# EAGLE board REMOTE_PCB (EAGLE 9.7.0)
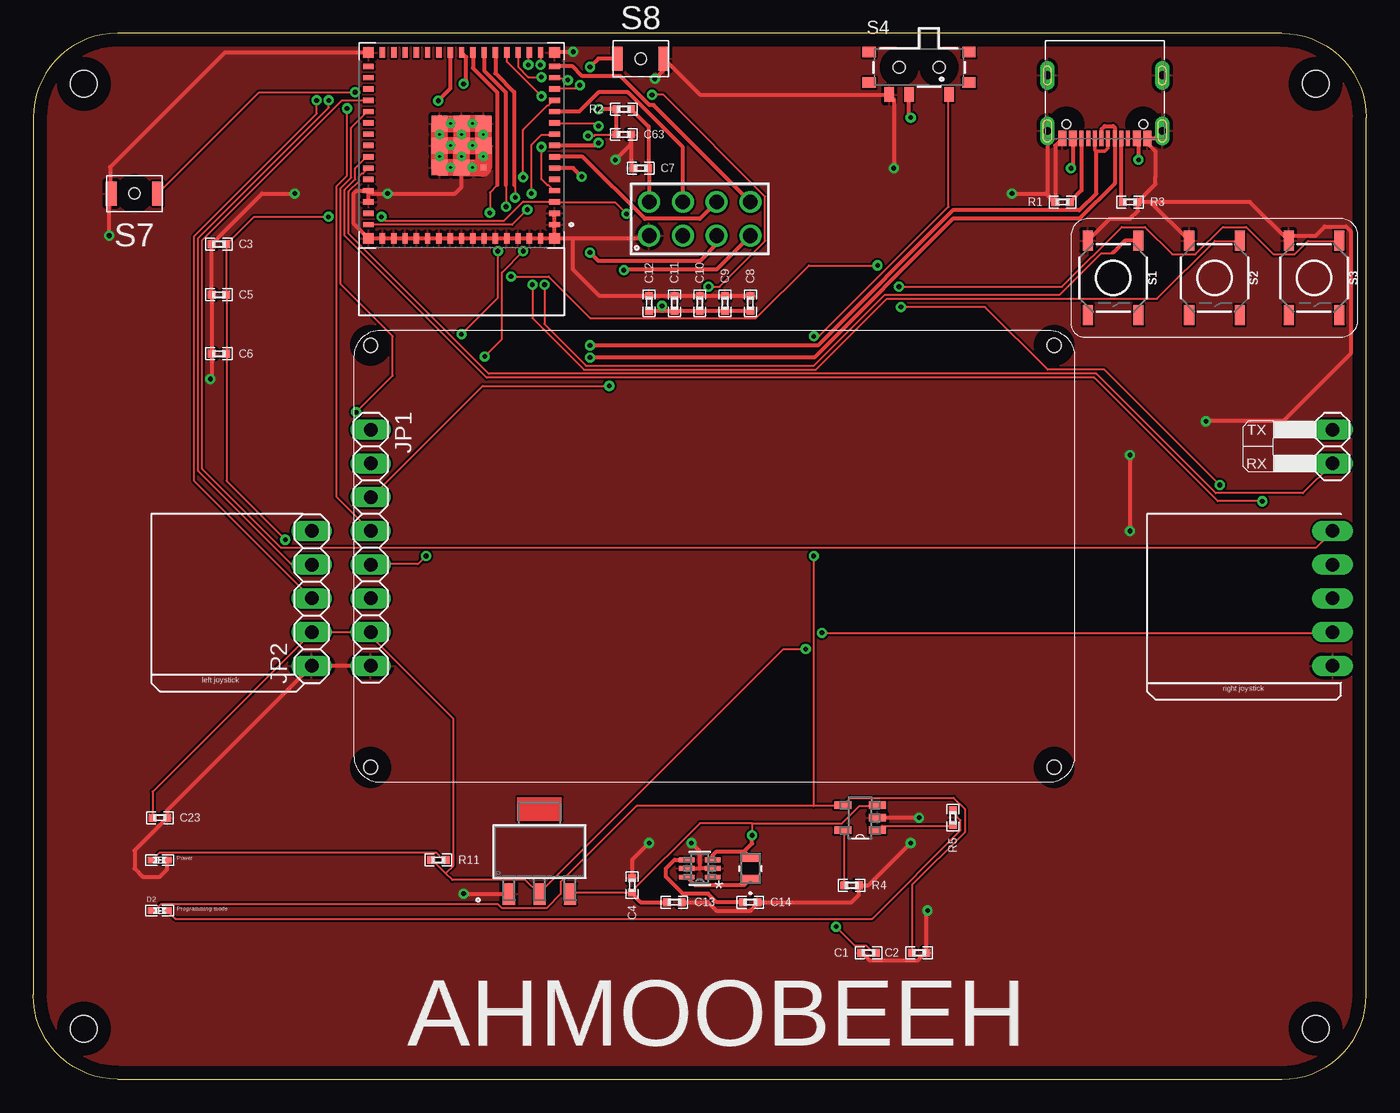
[diagram p0: board, top side]
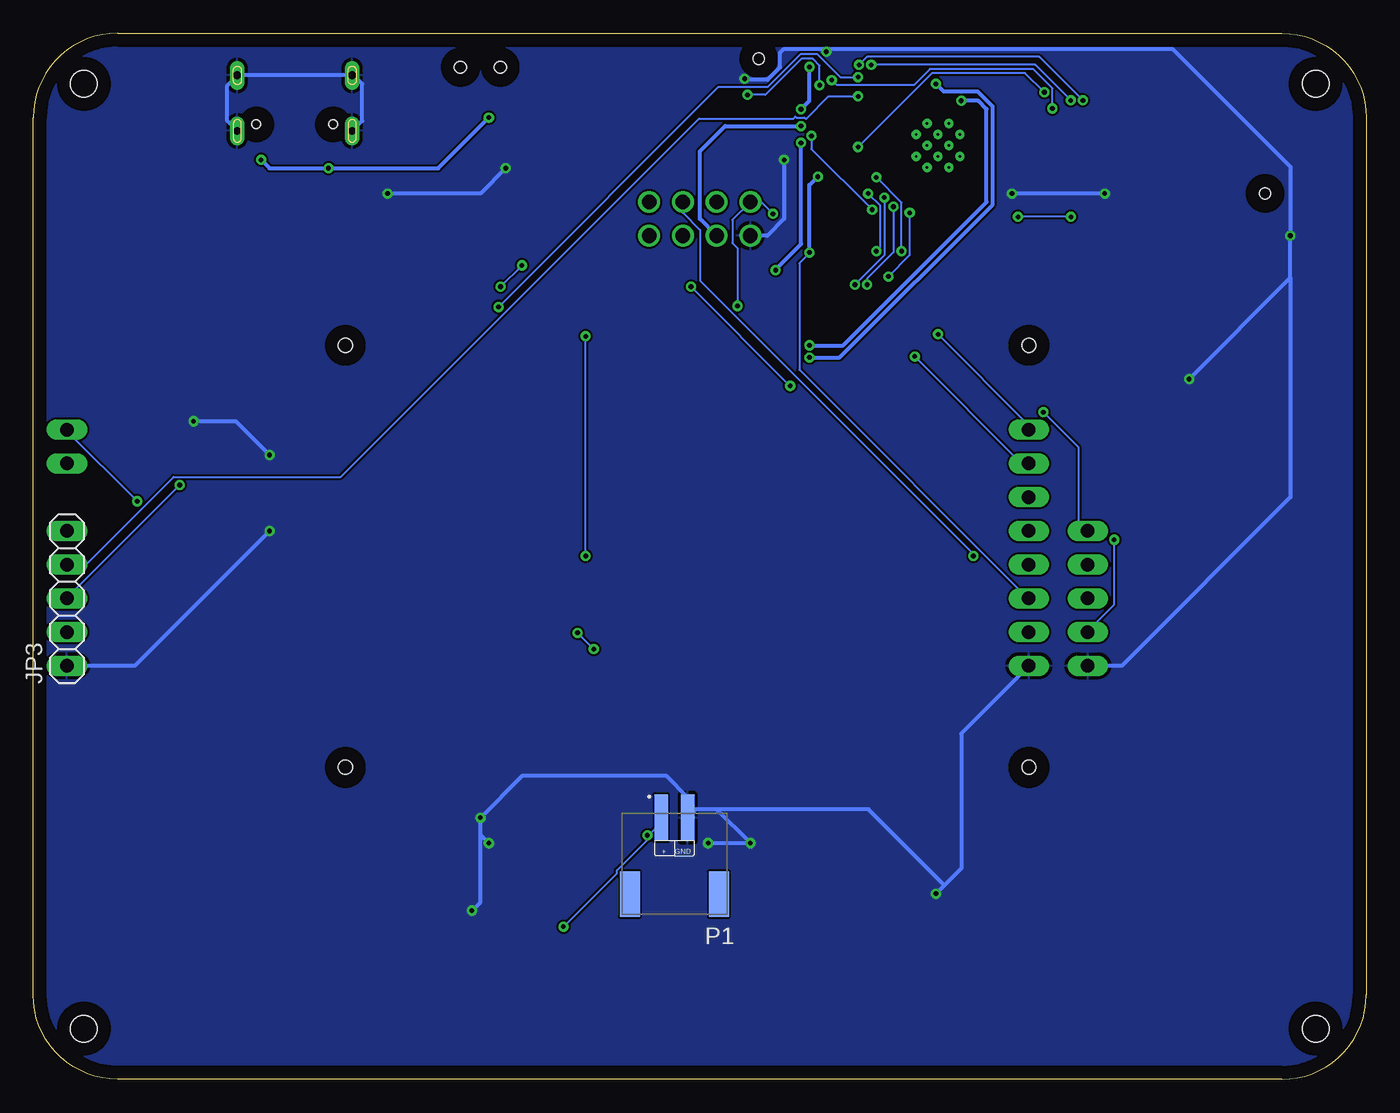
[diagram p1: board, bottom side, seen from below]

Size 100.33 x 78.74 mm. Coordinates in mm from the lower left corner, seen from the top.
Outline: 6.35,0 93.98,0 arc90 100.33,6.35 100.33,72.39 arc90 93.98,78.74 6.35,78.74 arc90 0,72.39 0,6.35 arc90 6.35,0
Copper layers (1*16): Top / Bottom
Stack-up Default Layer Stack: Top User Defined 0.035mm / Dielectric-1 User Defined 1.5mm / Bottom User Defined 0.035mm
Design rules: minimum copper width class=3 10mil, minimum copper width 6mil, minimum drill size 0.35mm, copper clearance wire_polygon to wire_polygon 6mil, copper clearance wire_polygon to pad_smd 6mil, copper clearance wire_polygon to via 6mil, copper clearance pad_smd to pad_smd 6mil, copper clearance pad_smd to via 6mil, copper clearance via to via 6mil, copper clearance smd to pad (same net) 6mil, copper clearance smd to via (same net) 6mil, copper clearance smd to smd (same net) 6mil, dimension clearance 40mil, via restrict clearance 0mil, restrict clearance 0mil, drill distance 6mil, keepout clearance 0mil
Net classes: 3 GND: width 0.254 mm
Holes 2 mm at 3.81,74.93 3.81,3.81 96.52,3.81 96.52,74.93
Holes 1.05 mm at 25.4,55.24 25.4,23.5 76.83,23.5 76.83,55.24

## Footprints (pad centres in the part's own frame; a part is rotated, then mirrored left to right if it is on the bottom)
0402 = smd 0.6 x 0.6: 1 -0.55,0; 2 0.55,0
SOT-223_STM = smd 0.914 x 1.6: 1 -2.3,-3.2; 2 0,-3.2; 3 2.3,-3.2
0402.LED = smd 0.7 x 0.5: P$1 -0.55,0; P$2 0.55,0
61300821121 = drill 1.1: 1 -3.81,-1.27; 2 -3.81,1.27; 3 -1.27,-1.27; 4 -1.27,1.27; 5 1.27,-1.27; 6 1.27,1.27; 7 3.81,-1.27; 8 3.81,1.27
1X08 = drill 1.016 long: 1 -8.89,0; 2 -6.35,0; 3 -3.81,0; 4 -1.27,0; 5 1.27,0; 6 3.81,0; 7 6.35,0; 8 8.89,0
1X05 = drill 1.016 long: 1 -5.08,0; 2 -2.54,0; 3 0,0; 4 2.54,0; 5 5.08,0
IND_TAIYO_LBR2012_TAY = smd 0.61 x 1.448: 1 -0.8,0; 2 0.8,0
JST_S2B-PH-SM4-TB = smd 1 x 3.5: 1 1,0; 2 -1,0 | smd 1.5 x 3.4: P1 3.35,5.75; P2 -3.35,5.75
TACTILE_SWITCH_SMD_5.2MM = smd 1.524 x 0.762: 1 -2.794,1.905; 2 2.794,1.905; 3 -2.794,-1.905; 4 2.794,-1.905
450404015514 = smd 0.7 x 1.1: 1 2.25,-2.05; 2 -0.75,-2.05; 3 -2.25,-2.05 | smd 1 x 0.8: Z1 -3.75,1.15; Z2 3.75,1.15; Z3 3.75,-1.15; Z4 -3.75,-1.15 | hole 0.9: -1.5,0; 1.5,0
B3U-1000P(M)-B = smd 0.8 x 1.8: 1 -1.75,0; 2 1.75,0 | hole 0.85: 0,0
SC70-SC6_LIT = smd 1.168 x 0.356: 1 -0.965,0.65; 2 -0.965,0; 3 -0.965,-0.65; 4 0.965,-0.65; 5 0.965,0; 6 0.965,0.65
SOT95P280X145-5N = smd 1.27 x 0.559: 1 -1.295,0.94; 2 -1.295,0; 3 -1.295,-0.94; 4 1.295,-0.94; 5 1.295,0.94
1X02 = drill 1.016 long: 1 -1.27,0; 2 1.27,0
XCVR_ESP32_S3_MINI-1-N4R2 = smd 0.8 x 0.4: 1 -7.09,6.24; 2 -7.09,5.39; 3 -7.09,4.54; 4 -7.09,3.69; 5 -7.09,2.84; 6 -7.09,1.99; 7 -7.09,1.14; 8 -7.09,0.29; 9 -7.09,-0.56; 10 -7.09,-1.41; 11 -7.09,-2.26; 12 -7.09,-3.11; 13 -7.09,-3.96; 14 -7.09,-4.81; 15 -7.09,-5.66; 31 6.91,-5.66; 32 6.91,-4.81; 33 6.91,-3.96; 34 6.91,-3.11; 35 6.91,-2.26; 36 6.91,-1.41; 37 6.91,-0.56; 38 6.91,0.29; 39 6.91,1.14; 40 6.91,1.99; 41 6.91,2.84; 42 6.91,3.69; 43 6.91,4.54; 44 6.91,5.39; 45 6.91,6.24 | smd 0.4 x 0.8: 16 -6.04,-6.71; 17 -5.19,-6.71; 18 -4.34,-6.71; 19 -3.49,-6.71; 20 -2.64,-6.71; 21 -1.79,-6.71; 22 -0.94,-6.71; 23 -0.09,-6.71; 24 0.76,-6.71; 25 1.61,-6.71; 26 2.46,-6.71; 27 3.31,-6.71; 28 4.16,-6.71; 29 5.01,-6.71; 30 5.86,-6.71; 46 5.86,7.29; 47 5.01,7.29; 48 4.16,7.29; 49 3.31,7.29; 50 2.46,7.29; 51 1.61,7.29; 52 0.76,7.29; 53 -0.09,7.29; 54 -0.94,7.29; 55 -1.79,7.29; 56 -2.64,7.29; 57 -3.49,7.29; 58 -4.34,7.29; 59 -5.19,7.29; 60 -6.04,7.29 | smd 0.4 x 0.4: 61_1 -1.74,1.94 | smd 1.2 x 1.2: 61_2 -0.09,1.94; 61_3 1.56,1.94; 61_4 -1.74,0.29; 61_5 -0.09,0.29; 61_6 1.56,0.29; 61_7 -1.74,-1.36; 61_8 -0.09,-1.36; 61_9 1.56,-1.36 | smd 0.8 x 0.8: 62 -7.09,7.29; 63 -7.09,-6.71; 64 6.91,-6.71; 65 6.91,7.29 | drill 0.2 pad 0.35: 66_1 -0.915,1.94; 66_2 0.735,1.94; 66_3 -1.74,1.115; 66_4 -0.09,1.115; 66_5 1.56,1.115; 66_6 -0.915,0.29; 66_7 0.735,0.29; 66_8 -1.74,-0.535; 66_9 -0.09,-0.535; 66_10 1.56,-0.535; 66_11 -0.915,-1.36; 66_12 0.735,-1.36
12402012E212A = smd 0.6 x 1.14: A1_B12 -3.2,4.75; A4_B9 -2.4,4.75; B1_A12 3.2,4.75; B4_A9 2.4,4.75 | smd 0.3 x 1.14: A5 -1.25,4.75; A6 -0.25,4.75; A7 0.25,4.75; A8 1.25,4.75; B5 1.75,4.75; B6 0.75,4.75; B7 -0.75,4.75; B8 -1.75,4.75 | drill 0.6 pad 1.05 long: SH1 -4.32,4.18; SH2 4.32,4.18 | drill 0.6 pad 0.9 long: SH3 -4.32,0; SH4 4.32,0 | hole 0.65: 2.89,3.68; -2.89,3.68

## Placement (x,y rotation side)
C1  0.1uF  [0402]  62.87,9.53 180 top
C2  0.1uF  [0402]  66.67,9.53 180 top
C3  0.1uF  [0402]  13.97,62.87 0 top
C4  0.1uF  [0402]  45.09,14.61 270 top
C5  100uF  [0402]  13.97,59.05 0 top
C6  100uF  [0402]  13.97,54.61 0 top
C7  100uF  [0402]  45.72,68.58 0 top
C8  100uF  [0402]  53.98,58.42 90 top
C9  100uF  [0402]  52.07,58.42 90 top
C10  100uF  [0402]  50.16,58.42 90 top
C11  100uF  [0402]  48.26,58.42 90 top
C12  100uF  [0402]  46.35,58.42 90 top
C13  1uF  [0402]  48.26,13.34 0 top
C14  10uF  [0402]  53.98,13.34 0 top
C23  0.1uF  [0402]  9.53,19.68 0 top
C63  0.1uF  [0402]  44.45,71.12 0 top
CR1  LD1117S33CTRSOT-223_STM  [SOT-223_STM]  38.1,17.14 0 top
D1  GREEN  [0402.LED]  9.53,16.51 0 top
D2  GREEN  [0402.LED]  9.53,12.7 0 top
J1  6130XX21121_61300821121  [61300821121]  50.16,64.77 0 top
JP1  PINHD-1X8  [1X08]  25.4,40.01 270 top
JP2  PINHD-1X5  [1X05]  20.95,36.2 90 top
JP3  PINHD-1X5  [1X05]  97.79,36.2 90 bottom
L1  LBR2012T100KIND_TAIYO_LBR2012_TAY  [IND_TAIYO_LBR2012_TAY]  53.98,15.88 90 top
P1  S2B-PH-SM4-TB  [JST_S2B-PH-SM4-TB]  52.07,19.68 180 bottom
R1  5.1K  [0402]  77.47,66.04 180 top
R2  10K  [0402]  44.45,73.03 180 top
R3  5.1K  [0402]  82.55,66.04 0 top
R4  2K  [0402]  61.59,14.61 0 top
R5  470  [0402]  69.22,19.68 270 top
R11  330  [0402]  30.48,16.51 0 top
S1  MOMENTARY-SWITCH-SPST-SMD-5.2MM-TALL  [TACTILE_SWITCH_SMD_5.2MM]  81.28,60.33 270 top
S2  MOMENTARY-SWITCH-SPST-SMD-5.2MM-TALL  [TACTILE_SWITCH_SMD_5.2MM]  88.9,60.33 270 top
S3  MOMENTARY-SWITCH-SPST-SMD-5.2MM-TALL  [TACTILE_SWITCH_SMD_5.2MM]  96.39,60.33 270 top
S4  450404015514  [450404015514]  66.67,76.17 0 top
S7  B3U-1000P(M)-B  [B3U-1000P(M)-B]  7.62,66.67 180 top
S8  B3U-1000P(M)-B  [B3U-1000P(M)-B]  45.72,76.82 0 top
U1  LTC3525ESC6-3.3TRMPBFSC70-SC6_LIT  [SC70-SC6_LIT]  50.16,15.88 180 top
U$1  MCP73831T-2ACI/OT  [SOT95P280X145-5N]  62.23,19.68 180 top
U$2  PINHD-1X02_1X02M  [1X02]  97.79,47.62 270 top
U$4  ESP32_S3_MINI  [XCVR_ESP32_S3_MINI-1-N4R2]  32.15,70.58 180 top
U$8  USB-C-1612402012E212A  [12402012E212A]  80.64,75.56 180 top

## Library data of the parts
C1-C14 C23 C63 D1 D2 R1-R5 R11 = CL-StandardParts
CR1 = LD1117; COPYRIGHT: Copyright (C) 2024 Ultra Librarian. All rights reserved.; MANUFACTURER_PART_NUMBER: LD1117S33CTR; MFR_NAME: STMicroelectronics
J1 = 6130XX21121_61300821121
JP1 = Connector; CATEGORY: Headers; DESCRIPTION: Header, Straight, 8 Position; MANUFACTURER: Generic; MPN: Generic; OPERATING_TEMPERATURE: Generic; PART_STATUS: Active; PITCH: 0.100" (2.54mm); ROHS_COMPLIANCE: Generic; SERIES: Generic; SUB-CATEGORY: Headers, Male Pins; TYPE: Board to Board or Cable, Unshrouded, Through Hole, Straight
JP2 JP3 = Connector; CATEGORY: Headers; DESCRIPTION: Header, Straight, 5 Position; MANUFACTURER: Generic; MPN: Generic; OPERATING_TEMPERATURE: Generic; PART_STATUS: Active; PITCH: 0.100" (2.54mm); ROHS_COMPLIANCE: Generic; SERIES: Generic; SUB-CATEGORY: Headers, Male Pins; TYPE: Board to Board or Cable, Unshrouded, Through Hole, Straight
L1 = 2025-04-16_01-13-47_Library; COPYRIGHT: Copyright (C) 2025 Ultra Librarian. All rights reserved.; MANUFACTURER_PART_NUMBER: LBR2012T100K; MFR_NAME: Taiyo Yuden
P1 = S2B-PH-SM4-TB; MANUFACTURER: JST
S1-S3 = SparkFun-Switches; PROD_ID: SWCH-14139
S4 = 450404015514
S7 S8 = Switch; CATEGORY: SWITCH; DESCRIPTION: Ultra-small Surface-mounting Tactile Switches with High Contact Reliability; MANUFACTURER: OMRON; OPERATING_TEMPERATURE: -25°C to +70°C at 60%RH max; PART_STATUS: ACTIVE; SERIES: B3U; TYPE: Tactile
U1 = 2025-04-16_00-30-35_Library; COPYRIGHT: Copyright (C) 2025 Ultra Librarian. All rights reserved.; MANUFACTURER_PART_NUMBER: LTC3525ESC6-3.3#TRMPBF; MFR_NAME: Analog Devices Inc
U$1 = MCP73831T-2ACI_OT; MPN: MCP73831T-2ACI/OT; OC_FARNELL: 1332158; OC_NEWARK: 56K7045; PACKAGE: SOT-5; SUPPLIER: Microchip
U$2 = Tinkercad
U$4 = CL-Digital IC; DIGIKEY: 1965-ESP32-S3-MINI-1-N4R2CT-ND; LCSC: C3013941
U$8 = CL-Connectors; DIGIKEY: 664-12402012E212ACT-ND; LCSC: C393939

## Nets
3.3V [diff_pair]: C3.2 C5.2 C6.2 C7.2 C8.1 C9.1 C10.1 C11.1 C12.1 C23.1 CR1.2 J1.2 JP1.7 JP2.2 JP3.2 R2.1 R11.1 U$4.3
5V [diff_pair]: C14.1 U1.4
BLK: JP1.1 U$4.12
CE: J1.3 U$4.10
CNS: J1.4 U$4.11
CS_LCD: JP1.2 U$4.9
DC: JP1.3 U$4.13
EN: C63.1 R2.2 S8.1 U$4.45
GND [GND]: C1.2 C2.1 C3.1 C4.1 C5.1 C6.1 C7.1 C8.2 C9.2 C10.2 C11.2 C12.2 C13.2 C14.2 C23.2 C63.2 CR1.1 D1.P$2 J1.1 JP1.8 JP2.1 JP3.1 P1.2 R1.2 R3.2 R4.2 S1.3 S2.3 S3.3 S4.3 S7.2 S8.2 U1.2 U1.5 U$1.2 U$4.1 U$4.2 U$4.42 U$4.43 U$4.46 U$4.47 U$4.48 U$4.49 U$4.50 U$4.51 U$4.52 U$4.53 U$4.54 U$4.55 U$4.56 U$4.57 U$4.58 U$4.59 U$4.60 U$4.61_1 U$4.61_2 U$4.61_3 U$4.61_4 U$4.61_5 U$4.61_6 U$4.61_7 U$4.61_8 U$4.61_9 U$4.62 U$4.63 U$4.64 U$4.65 U$8.A1_B12 U$8.B1_A12 U$8.SH1 U$8.SH2 U$8.SH3 U$8.SH4
GPIO0: S7.1 U$4.4
IRQ: J1.8 U$4.15
LEFT_J_SW: JP2.5 U$4.35
LEFT_J_X: JP2.3 U$4.16
LEFT_J_Y: JP2.4 U$4.17
MISO: J1.7 U$4.8
MOSI: J1.6 JP1.5 U$4.7
N$1: R1.1 U$8.B5
N$2: R3.1 U$8.A5
N$3: D1.P$1 R11.2
N$5: D2.P$2 R5.1
N$6: R5.2 U$1.1
N$7: C2.2 D2.P$1 S4.1 U$1.4
N$8: R4.1 U$1.5
N$10: L1.1 U1.6
N$11: U$4.36
RIGHT_J_SW: JP3.5 U$4.34
RIGHT_J_X: JP3.3 U$4.18
RIGHT_J_Y: JP3.4 U$4.19
RST: JP1.4 U$4.14
RX: U$2.2 U$4.40
SCK: J1.5 JP1.6 U$4.6
SW1: S1.1 U$4.20
SW2: S2.1 U$4.21
SW3: S3.1 U$4.22
TX: U$2.1 U$4.39
USB_D_N: U$4.23 U$8.A7 U$8.B7
USB_D_P: U$4.24 U$8.A6 U$8.B6
VBAT: C1.1 C4.2 C13.1 CR1.3 L1.2 P1.1 U1.3 U$1.3
VUSB: S4.2 U$8.A4_B9 U$8.B4_A9

## Tracks (layer width: path | path; a pad name or v marks a point on that pad's centre or on a via)
3.3V  (via drill 0.35)
  Top 0.152: v44.65,65.15 43.81,65.99 39.24,65.99 U$4.3 39.17,66.06 36.88,66.06 35.43,64.62 26.52,64.62 v26.21,64.92 | v47.32,58.22 47.32,57.87 | 14.55,59.05 14.55,54.63 C6.2 14.55,54.56 14.55,45.03 v18.97,40.62 | 14.55,59.05 14.55,62.87 | 14.55,59.05 C5.2 | C23.1 8.99,19.74 8.99,21.64 20.95,33.6 JP2.2 20.95,33.68 25.38,33.68 JP1.7 25.45,33.6 25.45,33.3 31.62,27.13 31.62,16.08 31.05,15.51 | 14.55,62.87 16.61,64.92 v22.23,64.92 | 14.55,62.87 C3.2 | 31.05,15.51 31.55,15.01 37.03,15.01 CR1.2 38.1,14.02 56.46,32.38 v58.14,32.38 | 31.05,15.51 30.1,16.46 29.95,16.46 R11.1 | v59.36,33.6 97.77,33.6 JP3.2
  Top 0.305: C7.2 46.31,68.54 | 46.31,68.54 46.35,68.5 J1.2 | R2.1 46.31,71.71 46.31,68.54 | C12.1 47.32,57.87 C11.1 C10.1 C9.1 C8.1
  Bottom 0.152: v44.65,65.15 45.57,66.06 46.33,66.06 J1.2 47.7,64.69 47.7,62.94 47.32,62.56 v47.32,58.22 | v18.97,40.62 18.97,35.74 20.95,33.76 JP2.2 | v58.14,32.38 v59.36,33.6 | v22.23,64.92 v26.21,64.92
5V
  Top 0.305: C14.1 51.44,13.34 50.8,13.97 48.9,13.97 47.62,15.24 47.62,15.88 48.27,16.52 U1.4
BLK  (via drill 0.35)
  Top 0.152: v36.88,67.89 36.88,71.48 38.71,73.3 38.79,73.3 39.17,73.69 U$4.12 | v34.98,62.33 34.98,58.83 v32.23,56.08
  Bottom 0.152: v36.88,67.89 34.98,65.99 v34.98,62.33 | v32.23,56.08 25.45,49.3 25.45,48.92 JP1.1
CE  (via drill 0.35)
  Top 0.152: v42.55,71.75 42.37,71.93 39.24,71.93 U$4.10
  Bottom 0.305: J1.3 50.16,64.77 50.16,69.85 48.26,71.75 v42.55,71.75
CNS
  Top 0.305: U$4.11 41.09,72.84 42.55,74.3 44.76,74.3 48.9,70.16 J1.4
CS_LCD  (via drill 0.35)
  Top 0.152: v37.49,66.67 37.49,70.33 38.25,71.09 39.17,71.09 U$4.9 | v36.88,62.33 35.28,60.73 35.28,55.7 v33.98,54.41
  Bottom 0.152: v37.49,66.67 36.58,65.76 36.58,62.64 v36.88,62.33 | v33.98,54.41 25.98,46.41 25.45,46.41 JP1.2
DC  (via drill 0.35)
  Top 0.152: v41.15,74.83 40.92,74.6 39.24,74.6 U$4.13 | v50.83,59.66 51.66,59.66 55.09,63.09 55.09,66.45 47.44,74.1 v46.57,74.1 | v43.36,52.2 33.83,52.2 25.45,43.81 JP1.3
  Bottom 0.152: v43.36,52.2 v50.83,59.66 | v41.15,74.83 41.15,76.3 41.66,76.81 42.51,76.81 45.22,74.1 v46.57,74.1
EN  (via drill 0.35)
  Top 0.152: v37.19,65.46 36.04,64.31 25.3,64.31 U$4.45 | v41.76,71.02 42.22,71.02 42.29,71.09 43.81,71.09 C63.1
  Top 0.305: C63.1 R2.2 v42.55,73.03 | S8.1 42.53,76.82 v41.91,76.2
  Bottom 0.152: v37.19,65.46 41.76,70.03 v41.76,71.02
  Bottom 0.305: v41.91,76.2 41.91,73.66 v42.55,73.03
GND  (via drill 0.35)
  Top 0.305: C7.1 45,68.75 C63.2 45,70.4 v43.81,69.22 | J1.1 46.14,63.29 40.64,63.29 | 40.64,63.29 U$4.62 | U$4.62 U$4.1 U$4.2 | U$4.62 U$4.60 U$4.59 U$4.58 U$4.57 U$4.56 U$4.55 U$4.54 U$4.53 U$4.52 U$4.51 U$4.50 U$4.49 U$4.48 U$4.47 U$4.46 U$4.65 24.13,64.39 24.13,66.67 24.34,66.89 U$4.42 | C8.2 C9.2 C10.2 C11.2 C12.2 42.63,58.97 40.64,60.96 40.64,63.29 | U$8.B1_A12 76.92,70.29 R1.2 | U$8.SH1 84.39,70.81 U$8.A1_B12 83.84,70.46 84.45,69.85 84.45,67.94 84.45,67.39 R3.2 | R3.2 83.14,66.08 83.14,66.04 | S1.3 81.03,64.77 82.55,64.77 83.14,65.36 83.14,66.04 | S2.3 84.07,66.04 83.14,66.04 | R3.2 91.57,66.04 S3.3 94.87,63.5 96.52,63.5 97.21,64.19 98.81,64.19 99.16,63.83 99.16,54.61 94.08,49.53 v88.27,49.53 | S8.2 47.54,76.75 | 47.54,76.75 50.17,74.12 S4.3 64.77,73.78 v64.77,68.58 | R1.2 76.83,66.04 76.2,66.67 v73.66,66.67 | U$8.SH2 76.33,66.64 R1.2 | U$4.63 39.3,77.35 v40.64,77.35 | v46.78,75.31 47.54,76.07 47.54,76.75 | v13.34,52.7 13.42,52.79 C6.1 C5.1 C3.1 17.23,66.67 v19.68,66.67 | v5.71,63.5 5.71,66.52 5.79,66.6 | 5.79,66.6 S7.2 | JP1.8 JP2.1 10.07,20.23 C23.2 7.62,17.23 7.62,15.88 8.26,15.24 9.53,15.24 10.07,15.79 D1.P$2 | v32.38,13.97 35.77,13.97 CR1.1 | C4.1 45.09,16.51 v46.35,17.78 | C1.2 62.38,9.53 62.99,8.92 66.55,8.92 67.16,9.53 C2.1 67.22,12.62 v67.31,12.7 | v66.04,17.78 62.87,14.61 R4.2 62.15,13.88 61.59,13.34 C14.2 54.52,13.25 53.98,12.7 51.42,12.7 50.79,13.34 C13.2 | v66.67,19.68 U$1.2 | U$4.43 U$4.42 | U$4.42 25.45,66.67 v26.67,66.67 31.75,66.67 32.24,67.16 32.24,68.58 U$4.61_2 | v82.55,46.99 v82.55,41.27 | U$4.64 14.42,77.29 5.79,68.66 5.79,66.6 | U1.5 50.16,15.88 | U1.2 50.16,15.88
  Top 0.305: 50.16,15.88 50.16,17.14 v49.53,17.78
  Top 1.27: U$4.61_6 U$4.61_3 U$4.61_2 U$4.61_5 | U$4.61_6 U$4.61_9 U$4.61_8 | U$4.61_8 U$4.61_5 | U$4.61_5 U$4.61_4 | U$4.61_4 U$4.61_7 U$4.61_8 | U$4.61_4 U$4.61_1 33.83,68.58 32.24,68.58 | U$4.61_5 U$4.61_6
  Bottom 0.305: v43.81,69.22 43.81,64.77 45.09,63.5 J1.1 | U$8.SH2 75.56,72.14 75.56,74.93 76.2,75.56 U$8.SH4 U$8.SH3 85.72,74.81 85.72,72.14 U$8.SH1 85.33,71.75 | v64.77,68.58 66.67,66.67 v73.66,66.67 | 40.87,77.57 v40.64,77.35 | 40.87,77.57 43.81,77.57 44.13,77.26 44.13,76.16 45.06,75.23 46.69,75.23 | 46.69,75.23 | 46.69,75.23 v46.78,75.31 | v13.34,52.7 5.71,60.33 | 5.71,60.33 v5.71,63.5 5.71,68.68 14.61,77.57 40.87,77.57 | JP1.8 30.48,26.04 30.48,15.88 31.75,14.61 | 31.75,14.61 v32.38,13.97 | 31.75,14.61 37.47,20.32 48.9,20.32 | 48.9,20.32 v46.35,17.78 v49.53,17.78 | 48.9,20.32 50.44,20.32 P1.2 51.07,21.23 52.7,22.86 63.5,22.86 v66.67,19.68 66.67,18.41 | v66.04,17.78 66.67,18.41 | v67.31,12.7 66.67,13.34 66.67,18.41 | v88.27,49.53 85.09,49.53 v82.55,46.99 | v82.55,41.27 92.71,31.11 JP3.1 | v19.68,66.67 v26.67,66.67 | 5.71,60.33 5.71,43.81 18.41,31.11 JP2.1
  pour Top: -13.34,87.63 107.95,87.63 107.95,-10.79 -13.34,-10.79
  pour Bottom: -33.66,98.42 115.57,98.42 115.57,-19.68 -33.66,-19.68
GPIO0  (via drill 0.35)
  Top 0.152: v38.25,70.18 38.25,67.74 38.71,67.28 38.79,67.28 39.17,66.9 U$4.4 | v24.23,74.3 16.99,74.3 S7.1
  Bottom 0.152: v38.25,70.18 32.69,75.74 25.68,75.74 v24.23,74.3
IRQ
  Top 0.305: U$4.15 40.6,76.24 41.32,75.52 44.19,75.52 46.37,73.33 46.69,73.33 J1.8
LEFT_J_SW  (via drill 0.35)
  Top 0.152: v24.31,50.22 27.05,52.96 27.05,55.93 23.14,59.84 23.14,67.08 23.93,67.87 23.93,71.63 25.07,72.77 25.22,72.77 U$4.35
  Bottom 0.152: v24.31,50.22 21.64,47.55 21.64,41.99 20.95,41.3 JP2.5
LEFT_J_X  (via drill 0.35)
  Top 0.152: v38.18,76.35 38.18,77.27 U$4.16 | v21.34,73.69 21.34,72.69 12.12,63.48 12.12,45.03 JP2.3
  Bottom 0.152: v38.18,76.35 37.57,76.96 24.61,76.96 v21.34,73.69
LEFT_J_Y  (via drill 0.35)
  Top 0.152: v37.26,76.35 37.26,77.27 U$4.17 | v22.25,73.69 22.25,73.15 12.42,63.33 12.42,45.79 19.43,38.79 20.95,38.79 JP2.4
  Bottom 0.152: v37.26,76.35 24.92,76.35 v22.25,73.69
MISO  (via drill 0.35)
  Top 0.305: J1.7 51.44,60.96 44.5,60.96 v44.45,60.91 | U$4.8 42.35,70.29 v42.55,70.48
  Bottom 0.305: v42.55,70.48 42.55,62.87 44.45,60.96 v44.45,60.91
MOSI  (via drill 0.35)
  Top 0.152: v29.57,39.4 28.96,38.79 25.45,38.79 JP1.5
  Top 0.305: J1.6 50.16,64.77 46.03,64.77 41.36,69.44 U$4.7
  Bottom 0.152: v29.57,39.4 29.57,39.55 50.14,60.12 50.14,63.93 51.44,65.23 J1.6
N$1
  Top 0.305: U$8.B5 78.89,66.92 R1.1
N$2
  Top 0.305: R3.1 81.89,66.14 U$8.A5
N$3
  Top 0.152: R11.2 31.01,16.54 30.86,16.54 30.33,17.07 9.53,17.07 8.99,16.54 D1.P$1
N$5
  Top 0.152: R5.1 69.27,20.19 69.27,20.04 69.8,19.51 69.8,18.75 63.15,12.09 10.69,12.09 10.13,12.65 D2.P$2
N$6
  Top 0.152: U$1.1 63.55,18.75 63.88,19.08 69.16,19.08 R5.2
N$7  (via drill 0.35)
  Top 0.152: C2.2 66.14,9.53 66.14,14.63 70.1,18.59 70.1,20.34 69.27,21.18 61.49,21.18 U$1.4 60.88,20.57 58.75,20.57 | 58.75,20.57 45.41,20.57 39.7,14.86 39.7,13.95 38.63,12.88 35.28,12.88 34.98,13.18 9.6,13.18 9.14,12.72 8.99,12.72 D2.P$1 | v58.75,55.93 59.13,55.93 68.89,65.68 68.89,74.07 S4.1 | 58.75,20.57 v58.75,39.4
  Bottom 0.152: v58.75,39.4 v58.75,55.93
N$8
  Top 0.152: R4.1 61.04,14.63 61.04,18.67 60.96,18.75 U$1.5
N$10
  Top 0.305: L1.1 53.51,14.61 49.82,14.61 U1.6
RIGHT_J_SW
  Top 0.152: U$4.34 25.22,73.69 23.24,73.69 12.73,63.17 12.73,45.95 18.67,40.01 96.55,40.01 97.77,41.22 JP3.5
RIGHT_J_X  (via drill 0.35)
  Top 0.152: v38.25,75.44 37.26,75.44 36.5,76.2 36.5,77.27 U$4.18 | v65.3,58.14 71.63,58.14 76.35,53.42 80.62,53.42 v89.31,44.73
  Bottom 0.152: v89.31,44.73 97.84,36.2 JP3.3 | v38.25,75.44 39.59,75.44 41.34,77.19 42.56,77.19 45.05,74.71 48.74,74.71 v65.3,58.14
RIGHT_J_Y  (via drill 0.35)
  Top 0.152: v38.25,73.99 35.66,76.58 35.66,77.27 U$4.19
  Bottom 0.152: v38.25,73.99 40.46,73.99 42.14,72.31 42.22,72.31 42.29,72.39 42.9,72.39 42.98,72.47 43.13,72.31 50.22,72.31 77.19,45.34 89.76,45.34 96.32,38.79 97.77,38.79 JP3.4
RST  (via drill 0.35)
  Top 0.152: v40.23,75.21 40.08,75.36 39.24,75.36 U$4.14 | v23.62,73.08 23.62,68 22.84,67.21 22.84,43.84 JP1.4
  Bottom 0.152: v40.23,75.21 39.85,74.83 34.06,74.83 32.84,76.05 25.07,76.05 23.62,74.6 v23.62,73.08
RX
  Top 0.152: U$2.2 95.56,44.12 89,44.12 80.01,53.11 34.29,53.11 23.75,63.65 23.75,66.83 24.54,67.62 24.54,67.97 24.77,68.2 24.84,68.2 25.22,68.58 U$4.40
SCK  (via drill 0.35)
  Top 0.305: J1.5 51.44,62.87 50.16,61.59 42.55,61.59 v41.91,62.23 | v41.27,67.94 40.63,68.59 U$4.6
  Bottom 0.152: JP1.6 25.45,36.2 42.67,53.42 42.67,61.42 41.99,62.1 v41.91,62.23
  Bottom 0.305: v41.91,62.23 41.91,67.31 v41.27,67.94
SW1  (via drill 0.35)
  Top 0.152: v38.48,59.82 38.48,56.84 41.6,53.72 58.75,53.72 64.08,59.05 77.27,59.05 80.39,62.18 81.15,62.18 81.28,62.23 | v36.27,66.37 36.27,67.21 36.2,67.31
  Top 0.305: S1.1 82.17,63.12 81.28,62.23 | U$4.20 34.79,75.71 36.2,74.31 36.2,67.31
  Bottom 0.152: v38.48,59.82 36.27,62.03 v36.27,66.37
SW2  (via drill 0.35)
  Top 0.152: v37.57,59.82 37.57,57.3 41.45,53.42 58.9,53.42 64.24,58.75 84.58,58.75 88.92,63.09 90.75,63.09 S2.1 | v35.59,65.68 35.59,67.21 35.56,67.31
  Top 0.305: U$4.21 33.94,75.92 35.56,74.3 35.56,67.31
  Bottom 0.152: v37.57,59.82 37.57,60.27 35.59,62.26 v35.59,65.68
SW3  (via drill 0.35)
  Top 0.152: v65.15,59.66 77.42,59.66 81.92,64.16 83.67,64.16 85.72,62.1 87.48,62.1 89.53,64.16 91.29,64.16 93.34,62.1 94.94,62.1 95.94,63.09 98.3,63.09 S3.1 | v63.55,61.27 58.37,61.27 54.41,57.3 41.91,57.3 38.79,60.43 v35.97,60.43 | v34.37,65.23 34.37,66.75 34.92,67.31
  Top 0.305: U$4.22 33.09,76.12 34.92,74.28 34.92,67.31
  Bottom 0.152: v63.55,61.27 v65.15,59.66 | v35.97,60.43 34.37,62.03 v34.37,65.23
TX  (via drill 0.35)
  Top 0.152: v92.51,43.51 89.15,43.51 79.86,52.81 34.14,52.81 23.44,63.5 23.44,66.96 24.23,67.75 24.23,68.58 25.07,69.42 25.22,69.42 U$4.39
  Bottom 0.152: v92.51,43.51 97.84,48.84 U$2.1
USB_D_N  (via drill 0.35)
  Top 0.305: U$8.A7 80.39,71.5 80.64,71.75 81.28,71.75 81.39,71.64 U$8.B7 81.39,67.42 78.74,64.77 69.22,64.77 58.78,54.34 v41.91,54.34 | v32.38,74.93 32.58,75.13 32.58,76.94 U$4.23
  Bottom 0.305: v41.91,54.34 39.63,54.34 28.12,65.85 28.12,73.21 29.25,74.34 31.8,74.34 v32.38,74.93
USB_D_P  (via drill 0.35)
  Top 0.254: 80,69.84 79.89,69.95 U$8.B6 | 80.01,69.85 80.64,69.85 80.89,70.1 U$8.A6
  Top 0.305: 80.01,66.69 80,66.68 | 80,66.68 78.73,65.41 69.2,65.41 59.04,55.24 v41.91,55.24 | U$4.24 31.39,74.57 v30.48,73.66 | 80.01,69.85 80,69.84 80,66.68
  Bottom 0.305: v41.91,55.24 39.37,55.24 28.57,66.04 28.57,73.03 29.21,73.66 v30.48,73.66
VBAT  (via drill 0.35)
  Top 0.152: CR1.3 40.46,13.95 40.54,14.02 45.03,14.02 C4.2 45.09,14.19 50.17,19.28 54.1,19.28 | 54.1,19.28 60.88,19.28 62.18,20.57 63.48,20.57 U$1.3 | 54.1,19.28 54.1,18.41 v54.1,18.36 | C1.1 63.24,9.53 62.71,10.05 61.86,10.05 v60.43,11.49
  Top 0.305: U1.3 51.13,16.84 51.44,17.14 53.51,17.14 | L1.2 53.51,17.14 | 53.51,17.14 54.1,17.74 54.1,18.41 | C13.1 45.72,13.34 45.03,14.02
  Bottom 0.152: 54.06,18.33 53.11,19.28 53.11,19.66 P1.1 | v54.1,18.36 54.06,18.33 | 54.06,18.33 54.06,18.06 56.4,15.73 56.4,15.51 v60.43,11.49
VUSB  (via drill 0.35)
  Top 0.305: U$8.B4_A9 78.25,68.72 v78.11,68.58 | v66.04,72.39 65.92,72.5 S4.2 | U$8.A4_B9 83.19,70.67 v83.19,69.22
  Bottom 0.305: v66.04,72.39 69.85,68.58 v78.11,68.58 82.55,68.58 v83.19,69.22

## Text on the board
SilkscreenTop: TX | TX | left joystick | right joystick | Power | Programming mode
SilkscreenBottom: GND | +
NamesTop: TX | RX | AHMOOBEEH
ValuesTop: RST | BOOT